# EAGLE board 4ButtonSwitch.Rev2 (EAGLE 8.6.0)
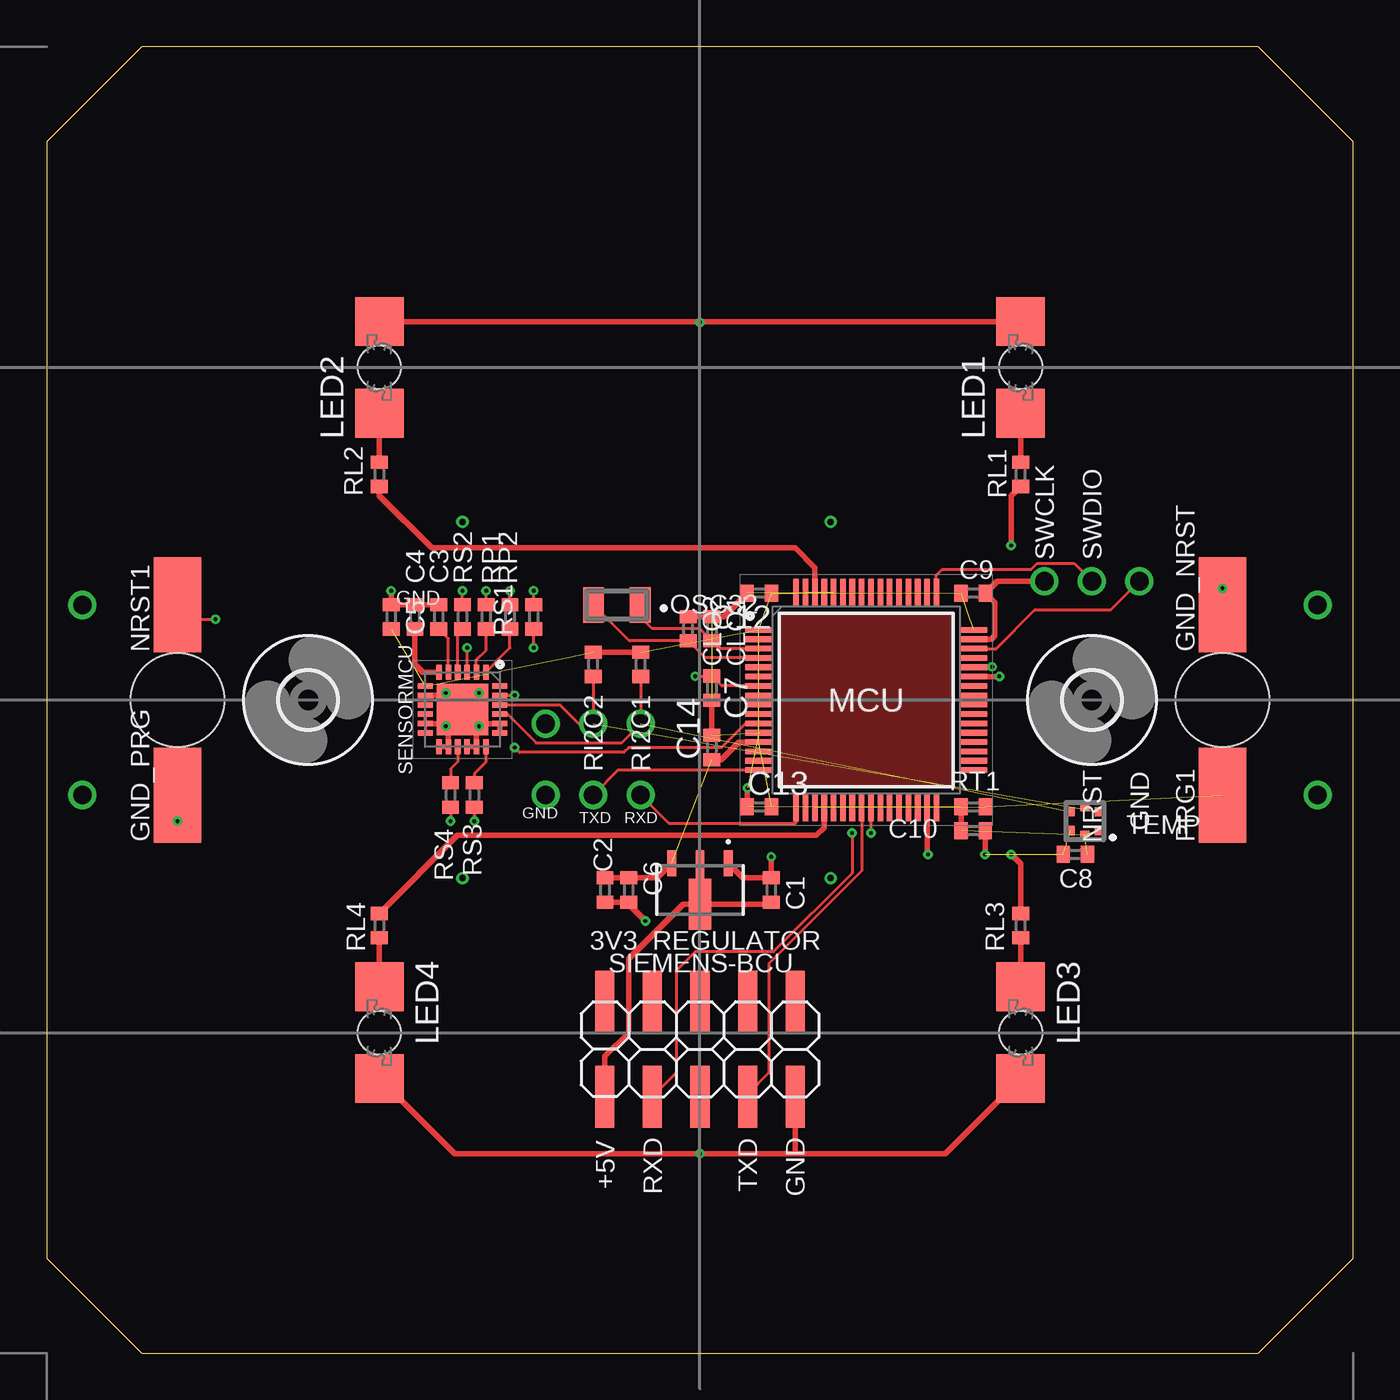
[diagram p0: board, top side]
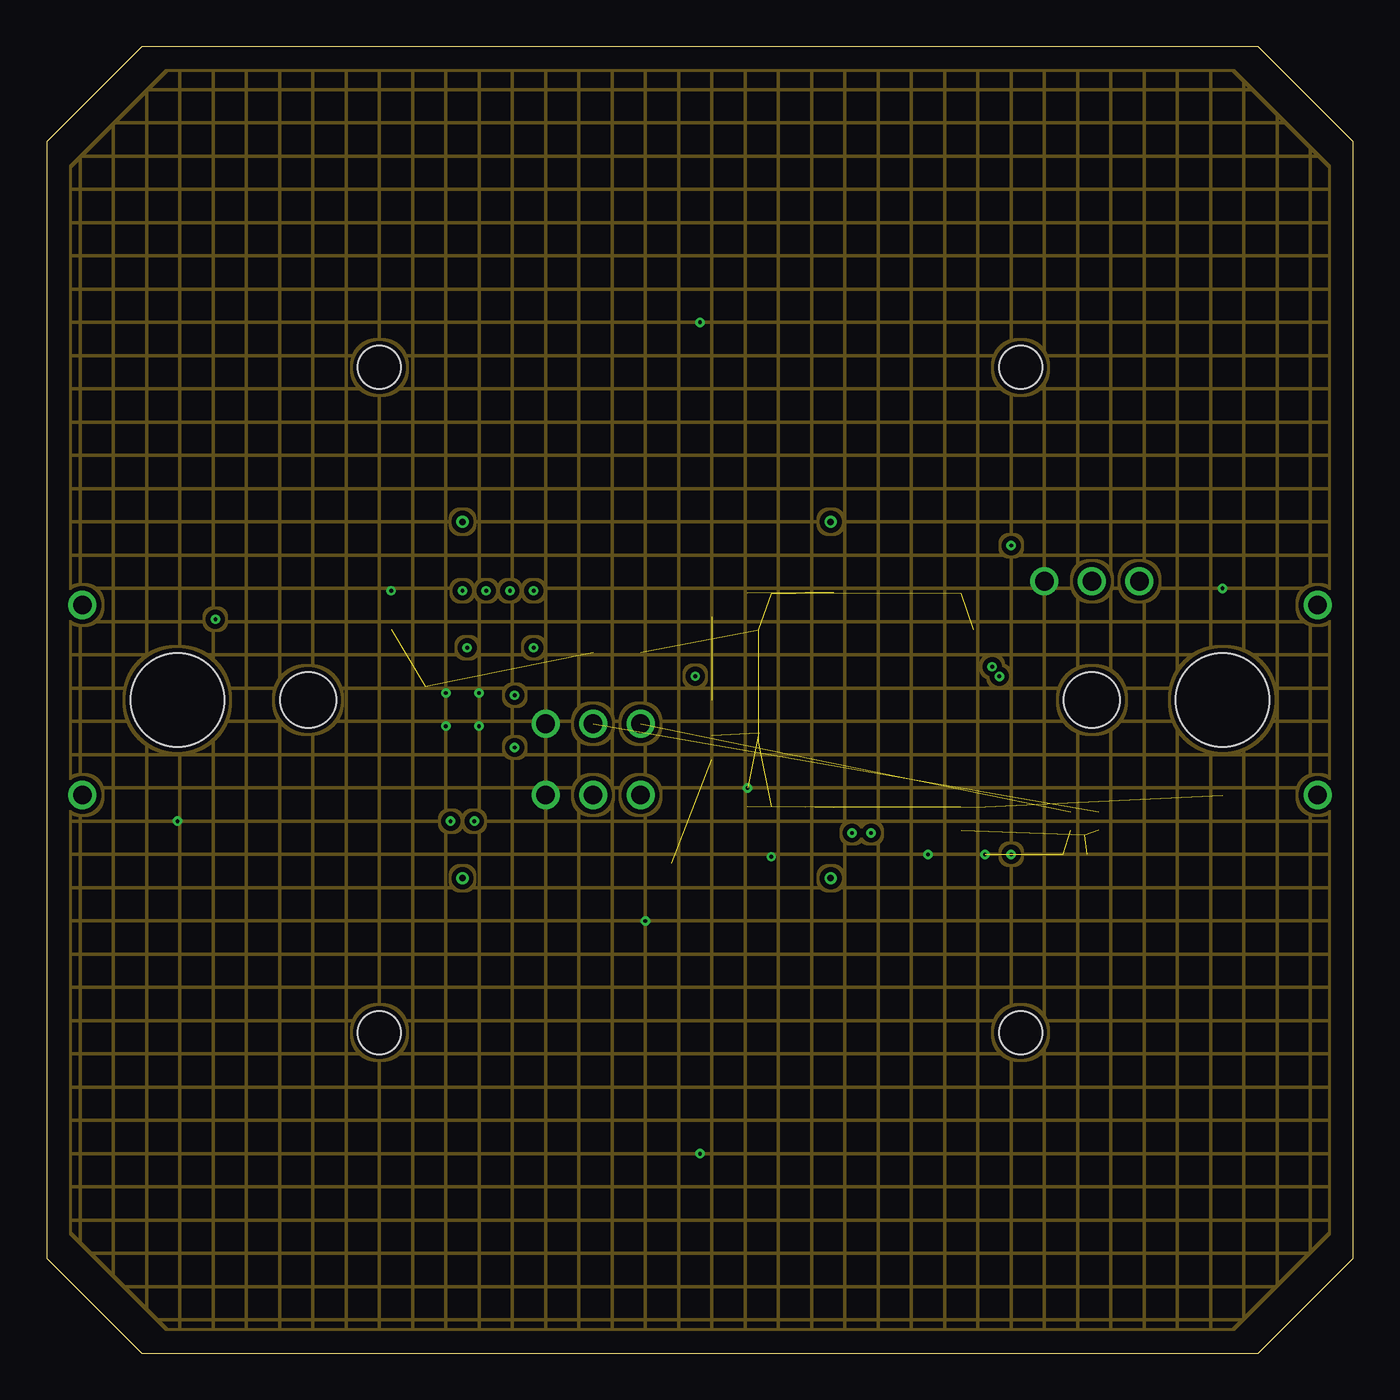
[diagram p1: board, inner layer Route2]
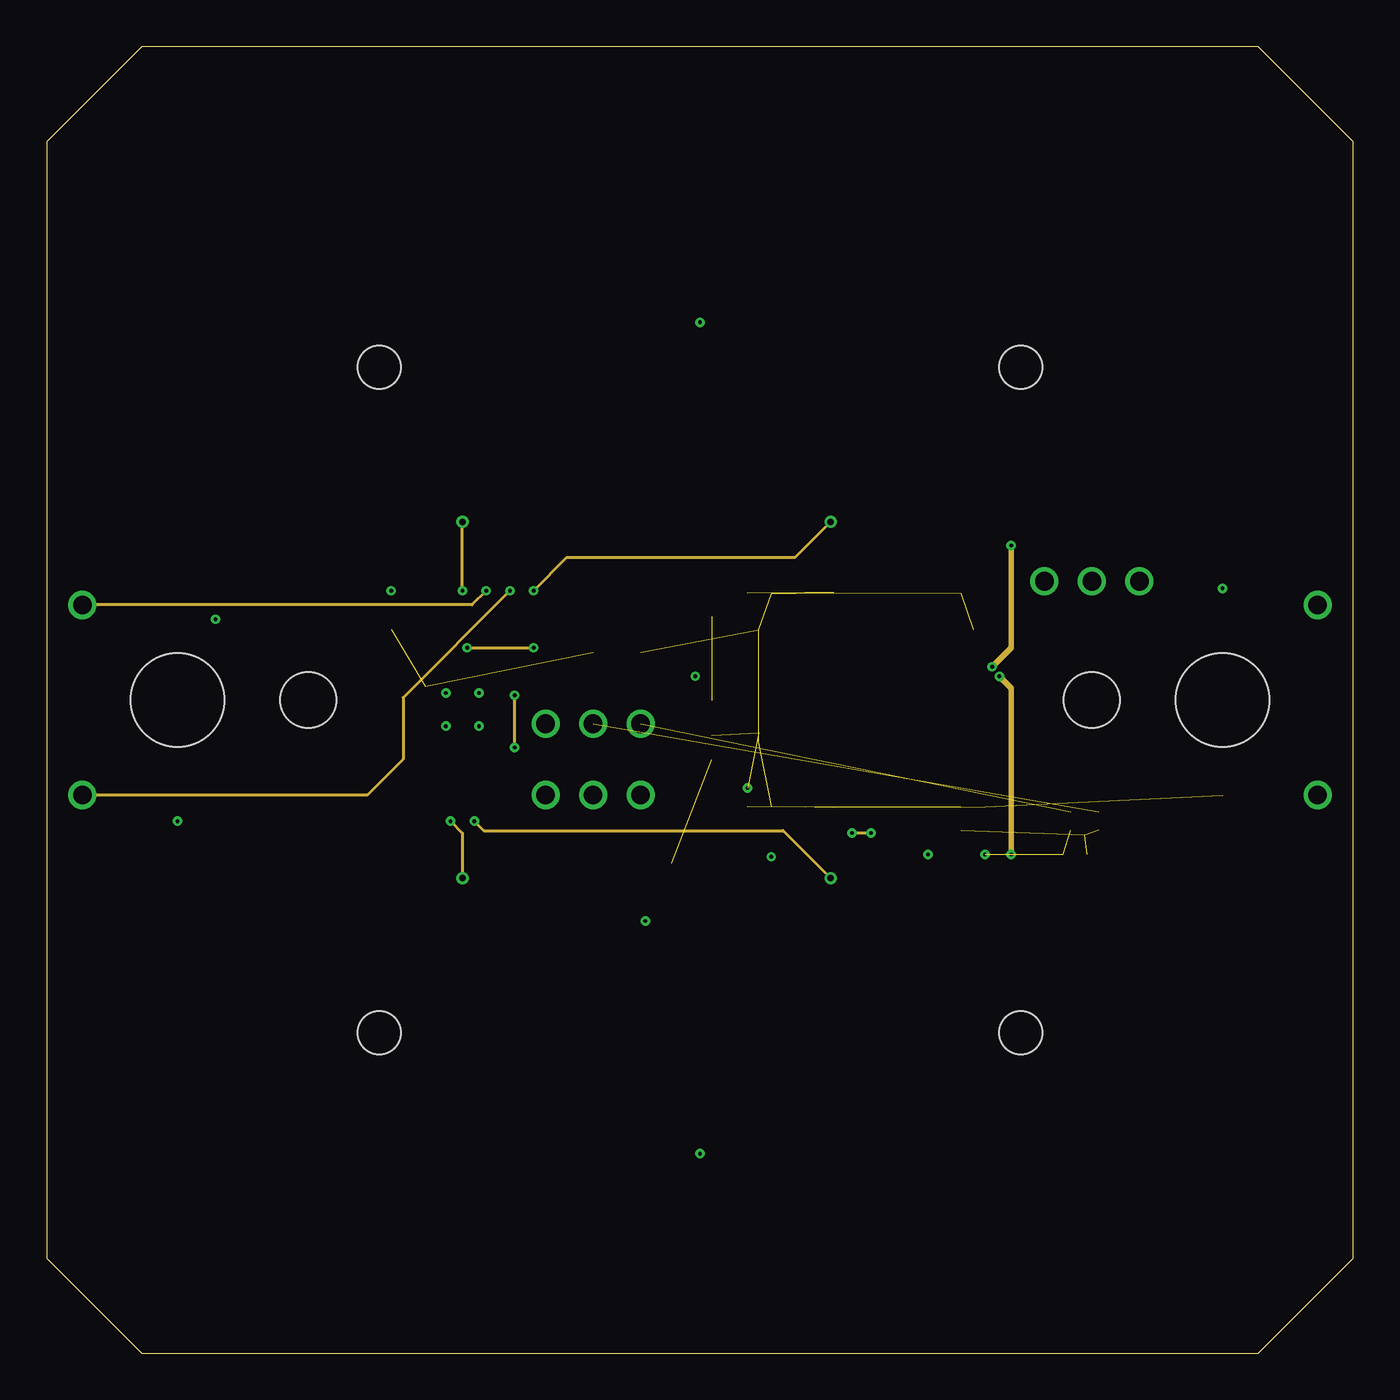
[diagram p2: board, inner layer Route15]
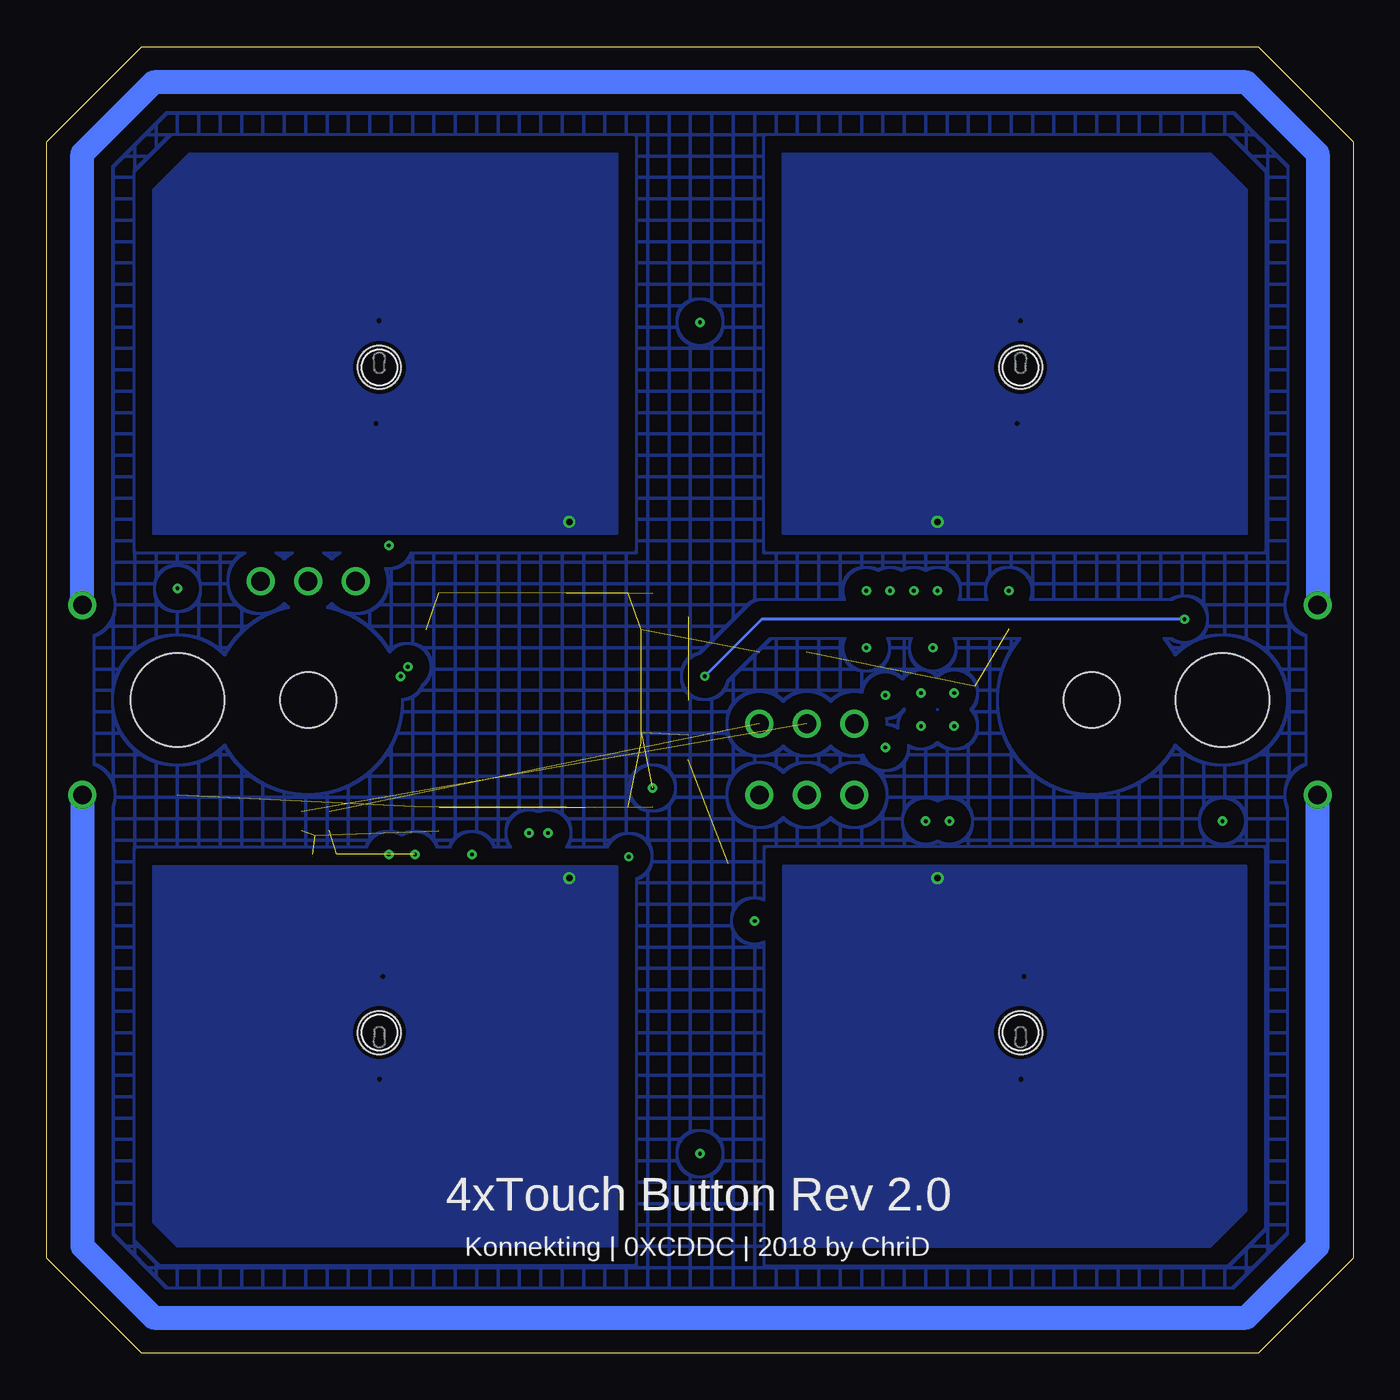
[diagram p3: board, bottom side, seen from below]

Size 69.85 x 69.85 mm. Coordinates in mm from the lower left corner, seen from the top.
Outline: 5.08,69.85 64.77,69.85 69.85,64.77 69.85,5.08 64.77,0 5.08,0 0,5.08 0,64.77 5.08,69.85
Outline: 6.34,69.84 5.08,69.85
Copper layers (1*2*15*16): Top 0.035mm / dielectric 0.23mm / Route2 0.035mm / dielectric 0.93mm / Route15 0.035mm / dielectric 0.23mm / Bottom 0.035mm
Design rules "MF_4_mil_drill_4_Layer": minimum track width 5mil, minimum drill 4mil, track to track 5mil, track to pad 5mil, pad to pad 5mil, via to via 5mil, smd to smd 0mil, copper to edge 10mil, drill to drill 10mil, minimum pad ring 6mil, minimum via ring 6mil, stop-mask expansion 2mil, vias tented up to drill 25mil, thermal gap 10mil
Holes 5 mm at 62.87,34.92 6.99,34.92

## Footprints (pad centres in the part's own frame; a part is rotated, then mirrored left to right if it is on the bottom)
SOT-89(MB) = smd 0.48 x 1.4: 1 -1.5,-1.425; 3 1.5,-1.425 | smd 0.48 x 1.525: 2 0,-1.363 | smd 1.2 x 2.725: 4 0,0.76
C0402 = smd 0.7 x 0.9: 1 -0.65,0; 2 0.65,0
SMD2,54-5,08 = smd 2.54 x 5.08: 1 0,0
P47F-BOTTOM = smd 2.6 x 2.6: A -2.45,0; C 2.45,0 | hole 2.3: 0,0
QFP50P1200X1200X160-64N = smd 1.475 x 0.3: 1 -5.738,3.75; 2 -5.738,3.25; 3 -5.738,2.75; 4 -5.738,2.25; 5 -5.738,1.75; 6 -5.738,1.25; 7 -5.738,0.75; 8 -5.738,0.25; 9 -5.738,-0.25; 10 -5.738,-0.75; 11 -5.738,-1.25; 12 -5.738,-1.75; 13 -5.738,-2.25; 14 -5.738,-2.75; 15 -5.738,-3.25; 16 -5.738,-3.75; 33 5.738,-3.75; 34 5.738,-3.25; 35 5.738,-2.75; 36 5.738,-2.25; 37 5.738,-1.75; 38 5.738,-1.25; 39 5.738,-0.75; 40 5.738,-0.25; 41 5.738,0.25; 42 5.738,0.75; 43 5.738,1.25; 44 5.738,1.75; 45 5.738,2.25; 46 5.738,2.75; 47 5.738,3.25; 48 5.738,3.75 | smd 0.3 x 1.475: 17 -3.75,-5.738; 18 -3.25,-5.738; 19 -2.75,-5.738; 20 -2.25,-5.738; 21 -1.75,-5.738; 22 -1.25,-5.738; 23 -0.75,-5.738; 24 -0.25,-5.738; 25 0.25,-5.738; 26 0.75,-5.738; 27 1.25,-5.738; 28 1.75,-5.738; 29 2.25,-5.738; 30 2.75,-5.738; 31 3.25,-5.738; 32 3.75,-5.738; 49 3.75,5.738; 50 3.25,5.738; 51 2.75,5.738; 52 2.25,5.738; 53 1.75,5.738; 54 1.25,5.738; 55 0.75,5.738; 56 0.25,5.738; 57 -0.25,5.738; 58 -0.75,5.738; 59 -1.25,5.738; 60 -1.75,5.738; 61 -2.25,5.738; 62 -2.75,5.738; 63 -3.25,5.738; 64 -3.75,5.738
ABS-07 = smd 1.1 x 1.9: 1 -1.25,0; 2 1.25,0
R0402 = smd 0.7 x 0.9: 1 -0.65,0; 2 0.65,0
QFN50P400X400X60-25N = smd 0.8 x 0.3: 1 -2,1.25; 2 -2,0.75; 3 -2,0.25; 4 -2,-0.25; 5 -2,-0.75; 6 -2,-1.25; 13 2,-1.25; 14 2,-0.75; 15 2,-0.25; 16 2,0.25; 17 2,0.75; 18 2,1.25 | smd 0.3 x 0.8: 7 -1.25,-2; 8 -0.75,-2; 9 -0.25,-2; 10 0.25,-2; 11 0.75,-2; 12 1.25,-2; 19 1.25,2; 20 0.75,2; 21 0.25,2; 22 -0.25,2; 23 -0.75,2; 24 -1.25,2 | smd 2.75 x 2.75: 25 0,0
2X05SMD = smd 1.016 x 3.302: 1 -1.27,-3.81; 2 -1.27,1.27; 3 1.27,-3.81; 4 1.27,1.27; 5 3.81,-3.81; 6 3.81,1.27; 7 6.35,-3.81; 8 6.35,1.27; 9 8.89,-3.81; 10 8.89,1.27
HLGA-6L = smd 0.45 x 0.5: 1 -0.75,0.5; 2 -0.75,-0.5; 4 0.75,-0.5; 5 0.75,0.5 | smd 0.5 x 0.45: 3 0,-0.75; 6 0,0.75
3,0 = hole 3: 0,0

## Placement (x,y rotation side)
3V3_REGULATOR  MCP1703T-3302E_MB  [SOT-89(MB)]  34.92,24.77 180 top
C1  1uF  [C0402]  38.73,24.77 270 top
C2  1uF  [C0402]  29.84,24.77 270 top
C3  2.2nF  [C0402]  20.95,39.37 90 top
C4  100nF  [C0402]  19.68,39.37 90 top
C5  100nf  [C0402]  18.41,39.37 270 top
C6  100nf  [C0402]  31.11,24.77 270 top
C7  100nF  [C0402]  35.56,35.56 270 top
C8  100nf  [C0402]  54.99,26.67 0 top
C9  100nf  [C0402]  49.53,40.64 0 top
C10  100nf  [C0402]  49.53,27.94 180 top
C12  100nf  [C0402]  38.1,40.64 180 top
C13  100nf  [C0402]  38.1,29.21 0 top
C14  100nf  [C0402]  35.56,32.38 90 top
CLO1  7pF  [C0402]  35.56,38.73 270 top
CLO2  7pf  [C0402]  34.29,38.73 270 top
GND_NRST  0  [SMD2,54-5,08]  62.87,40.01 0 top
GND_PRG  0  [SMD2,54-5,08]  6.99,29.84 0 top
LED1  LWP4-BOTTOM  [P47F-BOTTOM]  52.07,52.7 90 top
LED2  LWP4-BOTTOM  [P47F-BOTTOM]  17.78,52.7 90 top
LED3  LWP4-BOTTOM  [P47F-BOTTOM]  52.07,17.14 270 top
LED4  LWP4-BOTTOM  [P47F-BOTTOM]  17.78,17.14 270 top
MCU  STM32F303RET6  [QFP50P1200X1200X160-64N]  43.81,34.92 0 top
NRST1  0  [SMD2,54-5,08]  6.99,40.01 0 top
OSC32  ABS07-32.768KHZ-7-T  [ABS-07]  30.48,40.01 180 top
PRG1  0  [SMD2,54-5,08]  62.87,29.84 0 top
RI2C1  4k7  [R0402]  31.75,36.83 90 top
RI2C2  4k7  [R0402]  29.21,36.83 90 top
RL1  330E  [R0402]  52.07,46.99 90 top
RL2  330E  [R0402]  17.78,46.99 90 top
RL3  330E  [R0402]  52.07,22.86 270 top
RL4  330E  [R0402]  17.78,22.86 270 top
RP1  560E  [R0402]  23.5,39.37 270 top
RP2  560E  [R0402]  24.77,39.37 270 top
RS1  560E  [R0402]  26.04,39.37 270 top
RS2  560E  [R0402]  22.23,39.37 270 top
RS3  560E  [R0402]  22.86,29.84 90 top
RS4  560E  [R0402]  21.59,29.84 90 top
RT1  100K  [R0402]  49.53,29.21 0 top
SENSORMCU  CY8CMBR3116-LQXI  [QFN50P400X400X60-25N]  22.23,34.42 270 top
SIEMENS-BCU  SIEMENS BCU  [2X05SMD]  31.11,17.53 0 top
TEMP  HTS221TR  [HLGA-6L]  55.5,28.45 180 top
U$1  [3,0]  13.97,34.92 0 top
U$2  [3,0]  55.88,34.92 0 top

## Library data of the parts
3V3_REGULATOR = MCP1703T-3302E_MB; ALLIED_NUMBER: 70047986; ALLIED_PRICE/STOCK: https://www.alliedelec.com/microchip-technology-inc-mcp1703t-3302e-mb/70047986/; ARROW_PART_NUMBER: MCP1703T-3302E/MB; ARROW_PRICE/STOCK: https://www.arrow.com/en/products/mcp1703t-3302emb/microchip-technology; DESCRIPTION: LDO Low Iq 250mA 16V 3.3V 2% SOT89 Microchip MCP1703T-3302E/MB, LDO Voltage Regulator, 250mA, 3.3 V 2%, 2.7 16 Vin, 3-Pin SOT-89; HEIGHT: mm; MANUFACTURER_NAME: Microchip; MANUFACTURER_PART_NUMBER: MCP1703T-3302E/MB; RS_PART_NUMBER: 9122916; RS_PRICE/STOCK: http://uk.rs-online.com/web/p/products/9122916
C1-C10 C12-C14 CLO1 CLO2 = rcl; SPICEPREFIX: C
GND_NRST GND_PRG NRST1 PRG1 = wirepad
LED1-LED4 = led
MCU = STM32F303RET6; ARROW_PART_NUMBER: STM32F303RET6; ARROW_PRICE/STOCK: https://www.arrow.com/en/products/stm32f303ret6/stmicroelectronics; DESCRIPTION: MCU+FPU 32-Bit Cortex-M4 512KB LQFP64; HEIGHT: 1.6mm; MANUFACTURER_NAME: STMicroelectronics; MANUFACTURER_PART_NUMBER: STM32F303RET6; RS_PART_NUMBER: 1458887; RS_PRICE/STOCK: http://uk.rs-online.com/web/p/products/1458887
OSC32 = ABS07-32.768KHZ-7-T; ARROW_PART_NUMBER: ABS07-32.768KHZ-7-T; ARROW_PRICE/STOCK: https://www.arrow.com/en/products/abs07-32.768khz-7-t/abracon; DESCRIPTION: ABRACON - ABS07-32.768KHZ-7-T - CRYSTAL, 32.768KHZ, 7PF, SMD; HEIGHT: mm; MANUFACTURER_NAME: ABRACON; MANUFACTURER_PART_NUMBER: ABS07-32.768KHZ-7-T; RS_PART_NUMBER: 1712773P; RS_PRICE/STOCK: http://uk.rs-online.com/web/p/products/1712773P
RI2C1 RI2C2 RL1-RL4 RP1 RP2 RS1-RS4 RT1 = resistor
SENSORMCU = CY8CMBR3116-LQXI; ARROW_PART_NUMBER: CY8CMBR3116-LQXI; ARROW_PRICE/STOCK: https://www.arrow.com/en/products/cy8cmbr3116-lqxi/cypress-semiconductor; DESCRIPTION: Touch Screen Controllers CapSense Express 16 Buttons; HEIGHT: 0.6mm; MANUFACTURER_NAME: Cypress Semiconductor; MANUFACTURER_PART_NUMBER: CY8CMBR3116-LQXI; RS_PART_NUMBER: 1242976P; RS_PRICE/STOCK: http://uk.rs-online.com/web/p/products/1242976P
SIEMENS-BCU = pinhead
TEMP = HTS221TR; ARROW_PART_NUMBER: HTS221TR; ARROW_PRICE/STOCK: https://www.arrow.com/en/products/hts221tr/stmicroelectronics; DESCRIPTION: Humidity and Temperature Sensor HLGA6 STMicroelectronics HTS221TR Temperature & Humidity Sensor, -40 +120 C, 6-Pin HLGA; HEIGHT: mm; MANUFACTURER_NAME: STMicroelectronics; MANUFACTURER_PART_NUMBER: HTS221TR; RS_PART_NUMBER: 1660935; RS_PRICE/STOCK: http://uk.rs-online.com/web/p/products/1660935
U$1 U$2 = holes

## Nets
+3V3: 3V3_REGULATOR.3 C2.1 C5.2 C6.1 C8.2 C9.1 C10.2 C12.1 C13.2 C14.1 MCU.1 MCU.13 MCU.19 MCU.32 MCU.48 MCU.64 RI2C1.2 RI2C2.2 RT1.1 SENSORMCU.7 TEMP.1 TEMP.6
+5V: 3V3_REGULATOR.2 3V3_REGULATOR.4 C1.2 SIEMENS-BCU.1
CMOD: C3.1 SENSORMCU.5
GND: 3V3_REGULATOR.1 C1.1 C2.2 C3.2 C4.2 C5.1 C6.2 C7.2 C8.1 C9.2 C10.1 C12.2 C13.1 C14.2 CLO1.1 CLO2.1 GND_NRST.1 GND_PRG.1 LED1.C LED2.C LED3.C LED4.C MCU.12 MCU.18 MCU.31 MCU.47 MCU.60 MCU.63 SENSORMCU.8 SENSORMCU.10 SENSORMCU.11 SENSORMCU.12 SENSORMCU.13 SENSORMCU.14 SENSORMCU.16 SENSORMCU.17 SENSORMCU.19 SENSORMCU.20 SENSORMCU.25 SIEMENS-BCU.9 TEMP.5
HOST_INT: MCU.11 SENSORMCU.23
I2C1_SCL: MCU.58
I2C1_SDA: MCU.59
I2C2_SCL: MCU.6
I2C2_SDA: MCU.5
I2C3_SCL: MCU.41
I2C3_SDA: MCU.40
I2C_SCL: RI2C2.1 SENSORMCU.22 TEMP.2
I2C_SDA: RI2C1.1 SENSORMCU.21 TEMP.4
IC_SENS_1: RS1.2 SENSORMCU.3
IC_SENS_2: RS2.2 SENSORMCU.4
IC_SENS_3: RS3.2 SENSORMCU.18
IC_SENS_4: RS4.2 SENSORMCU.15
IC_SENS_PROX_1: RP1.2 SENSORMCU.2
IC_SENS_PROX_2: RP2.2 SENSORMCU.1
LED1: MCU.44 RL1.1
LED2: MCU.62 RL2.1
LED3: MCU.43 RL3.1
LED4: MCU.20 RL4.1
N$19: LED1.A RL1.2
N$20: LED2.A RL2.2
N$21: LED3.A RL3.2
N$22: LED4.A RL4.2
NRST: C7.1 MCU.7 NRST1.1
OSC32_IN: CLO1.2 MCU.3 OSC32.1
OSC32_OUT: CLO2.2 MCU.4 OSC32.2
PRG: MCU.21 PRG1.1 RT1.2
SENS_1: RS1.1
SENS_2: RS2.1
SENS_3: RS3.1
SENS_4: RS4.1
SENS_PROX_1: RP1.1
SENS_PROX_2: RP2.1
SHIELD: SENSORMCU.9
SWCLK: MCU.49
SWDIO: MCU.46
USART1_RX: MCU.25 SIEMENS-BCU.3
USART1_TX: MCU.24 SIEMENS-BCU.7
USART2_RX: MCU.17
USART2_TX: MCU.16
USART3_RX: MCU.30
USART3_TX: MCU.29
VCC: C4.1 SENSORMCU.6

## Tracks (layer width: path | path; a pad name or v marks a point on that pad's centre or on a via)
+3V3  (16 unrouted)
  Top 0.305: C2.1 C6.1 32.65,25.41 3V3_REGULATOR.3 | 48.86,29.19 RT1.1 C10.2 48.75,28.07 | RI2C2.2 RI2C1.2 | MCU.13 36.99,32.67 36.05,31.73 C14.1 | 40.04,40.64 MCU.64
  pour Top: 39.37,39.37 39.37,30.48 48.26,30.48 48.26,39.37
+5V
  Top 0.152: 3V3_REGULATOR.4 3V3_REGULATOR.2
  Top 0.305: SIEMENS-BCU.1 29.84,15.88 31.11,17.14 31.11,21.08 34.04,24 3V3_REGULATOR.4 38.62,24 C1.2
CMOD
  Top 0.152: SENSORMCU.5 21.48,38.2 C3.1
GND  (via drill 0.2, 1)  (8 unrouted)
  Top 0.152: SENSORMCU.12 SENSORMCU.10 SENSORMCU.11
  Top 0.305: 40.01,13.34 SIEMENS-BCU.9 40.01,10.67 | SENSORMCU.13 SENSORMCU.14 21.48,33.39 | 21.48,33.39 v21.34,33.53 21.2,33.67 SENSORMCU.11 | SENSORMCU.19 SENSORMCU.20 23.25,33.67 v23.11,33.53 22.98,33.39 SENSORMCU.17 SENSORMCU.16 | SENSORMCU.25 21.48,33.67 21.48,33.39 | SENSORMCU.8 21.2,35.17 v21.34,35.31 | C3.2 C4.2 C5.1 v18.41,40.77 | C2.2 C6.2 31.11,24 v32,23.11 | 3V3_REGULATOR.1 37.2,25.41 C1.1 v38.73,26.54 | GND_PRG.1 v6.99,28.45 | GND_NRST.1 v62.87,40.89 | MCU.47 50.49,38.17 50.67,38.35 50.67,40.15 C9.2 50.81,41.27 v53.34,41.27 | LED3.C 48.04,10.67 40.01,10.67 | 40.01,10.67 v34.92,10.67 21.81,10.67 LED4.C | LED2.C 34.89,55.16 | 34.89,55.16 v34.92,55.12 | LED1.C 34.89,55.16 | C7.2 C14.2 | CLO2.1 CLO1.1 36.2,39.38 C12.2 | C13.1 37.45,30.21 v37.47,30.23 | MCU.31 47.06,26.72 v47.12,26.67 | C10.1 50.18,26.68 v50.16,26.67
  other vias: 23.11,35.31 26.67,29.84 26.67,33.66
  pour Route2 (isolate 0.254, rank 6, no thermals, hatched): 1.27,63.5 6.35,68.58 63.5,68.58 68.58,63.5 68.58,6.35 63.5,1.27 6.35,1.27 1.27,6.35
HOST_INT  (via drill 0.2)
  Top 0.152: SENSORMCU.23 25.01,35.17 v25.02,35.18 | MCU.11 37.36,33.67 36.07,32.38 31.11,32.38 30.86,32.13 25.27,32.13 v25.02,32.38
  Route15 0.152: v25.02,32.38 v25.02,35.18
I2C_SCL  (via drill 1)  (1 unrouted)
  Top 0.152: SENSORMCU.22 27.44,34.67 28.45,33.66 v29.21,33.66 RI2C2.1
I2C_SDA  (via drill 1)  (1 unrouted)
  Top 0.152: SENSORMCU.21 24.63,34.17 26.16,32.64 30.73,32.64 v31.75,33.66 RI2C1.1
IC_SENS_1  (via drill 0.2)
  Top 0.152: SENSORMCU.3 v22.48,37.72 | v26.04,37.72 RS1.2
  Route15 0.152: v22.48,37.72 v26.04,37.72
IC_SENS_2
  Top 0.152: SENSORMCU.4 21.98,38.47 RS2.2
IC_SENS_3
  Top 0.152: SENSORMCU.18 23.48,31.6 22.86,30.99 RS3.2
IC_SENS_4
  Top 0.152: SENSORMCU.15 21.98,31.63 21.59,31.24 RS4.2
IC_SENS_PROX_1
  Top 0.152: SENSORMCU.2 22.98,37.07 23.5,37.59 RP1.2
IC_SENS_PROX_2
  Top 0.152: SENSORMCU.1 24.77,37.71 RP2.2
LED1  (via drill 0.2)
  Top 0.305: MCU.44 50.52,36.67 v50.55,36.7 | v51.56,43.18 51.56,45.83 RL1.1
  Route15 0.305: v50.55,36.7 51.56,37.72 v51.56,43.18
LED2
  Top 0.305: MCU.62 41.06,41.99 40.01,43.05 20.57,43.05 17.78,45.85 RL2.1
LED3  (via drill 0.2)
  Top 0.305: RL3.1 52.07,26.16 v51.56,26.67 | MCU.43 50.32,36.17 50.33,36.17 50.91,36.17 v50.93,36.19
  Route15 0.305: v51.56,26.67 51.56,35.56 v50.93,36.19
LED4
  Top 0.305: MCU.20 41.56,28.1 41.15,27.69 21.96,27.69 RL4.1
N$19
  Top 0.305: RL1.2 LED1.A
N$20
  Top 0.305: RL2.2 LED2.A
N$21
  Top 0.305: LED3.A RL3.2
N$22
  Top 0.305: LED4.A RL4.2
NRST  (via drill 0.2)
  Top 0.152: MCU.7 36.09,35.67 C7.1 35.55,36.2 v34.67,36.2 | NRST1.1 7.75,39.24 v9.02,39.24
  Bottom 0.152: v9.02,39.24 31.62,39.24 v34.67,36.2
OSC32_IN
  Top 0.152: OSC32.1 31.73,39.39 32.38,38.73 34.91,38.73 CLO1.2 35.97,37.67 MCU.3
OSC32_OUT
  Top 0.152: OSC32.2 31.15,38.09 CLO2.2 35.2,37.17 MCU.4
PRG  (2 unrouted)
SENS_1  (via drill 0.2, 0.35)
  Top 0.152: RS1.1 v26.04,40.77
  Route15 0.152: v26.04,40.77 27.81,42.55 40.01,42.55 v41.91,44.45
  pour Bottom: 39.37,43.81 64.14,43.81 64.14,62.23 62.23,64.14 39.37,64.14
SENS_2  (via drill 0.2, 0.35)
  Top 0.152: RS2.1 v22.23,40.77
  Route15 0.152: v22.23,40.77 v22.23,44.45
  pour Bottom: 5.71,62.23 5.71,43.81 30.48,43.81 30.48,64.14 7.62,64.14
SENS_3  (via drill 0.2, 0.35)
  Top 0.152: RS3.1 v22.86,28.45
  Route15 0.152: v22.86,28.45 23.37,27.94 39.37,27.94 v41.91,25.4
  pour Bottom: 39.37,5.71 62.87,5.71 64.14,6.99 64.14,26.04 39.37,26.04
SENS_4  (via drill 0.2, 0.35)
  Top 0.152: RS4.1 v21.59,28.45
  Route15 0.152: v21.59,28.45 22.23,27.81 v22.23,25.4
  pour Bottom: 5.71,26.04 30.48,26.04 30.48,5.71 7.62,5.71 5.71,7.62
SENS_PROX_1  (via drill 0.2, 1)
  Top 0.152: RP1.1 v23.5,40.77
  Route15 0.152: v23.5,40.77 22.73,40.01 v1.91,40.01
  Bottom 1.27: v1.91,40.01 1.91,64.14 5.71,67.94 64.14,67.94 67.94,64.14 v67.94,40.01
SENS_PROX_2  (via drill 0.2, 1)
  Top 0.152: RP2.1 v24.77,40.77
  Route15 0.152: v24.77,40.77 19.05,35.05 19.05,31.75 17.14,29.84 v1.91,29.84
  Bottom 1.27: v1.91,29.84 1.91,5.71 5.71,1.91 64.14,1.91 67.94,5.71 v67.94,29.84
SHIELD
  pour Bottom (isolate 0.889, rank 6, no thermals, hatched): 2.54,6.35 6.35,2.54 63.5,2.54 67.31,6.35 67.31,63.5 64.77,66.04 64.77,67.31 6.35,67.31 2.54,63.5
  pour Top (isolate 0.889, rank 6, no thermals, hatched): 0.64,5.08 5.08,0.64 64.77,0.64 69.22,5.08 69.22,64.77 64.77,69.22 5.08,69.22 0.64,64.77
SWCLK  (via drill 1)
  Top 0.152: MCU.49 47.56,41.6 47.88,41.91 52.63,41.91 52.95,42.23 54.93,42.23 v55.88,41.27
SWDIO  (via drill 1)
  Top 0.152: MCU.46 50.76,37.67 52.83,39.75 56.9,39.75 v58.42,41.27
USART1_RX  (via drill 0.2)
  Top 0.152: MCU.25 v44.06,27.82 v44.07,27.81 | v43.05,27.81 43.05,25.67 38.85,21.46 34.67,21.46 33.66,20.45 33.66,14.99 SIEMENS-BCU.3
  Route15 0.152: v44.07,27.81 v43.05,27.81
USART1_TX
  Top 0.152: MCU.24 43.56,25.79 38.61,20.83 38.61,14.99 37.47,13.84 SIEMENS-BCU.7
USART2_RX  (via drill 1)
  Top 0.152: MCU.17 40.06,28.38 40.01,28.32 33.27,28.32 v31.75,29.84
USART2_TX  (via drill 1)
  Top 0.152: MCU.16 30.54,31.18 v29.21,29.84
VCC
  Top 0.305: SENSORMCU.6 20.1,36.42 19.68,36.83 C4.1

## Text on the board
tNames: SWCLK | SWDIO | GND | GND | TXD | RXD | GND | NRST | +5V | RXD | TXD | GND
bNames: 4xTouch Button Rev 2.0 | Konnekting | 0XCDDC | 2018 by ChriD